# EAGLE board Trafic_led (EAGLE 9.6.2)
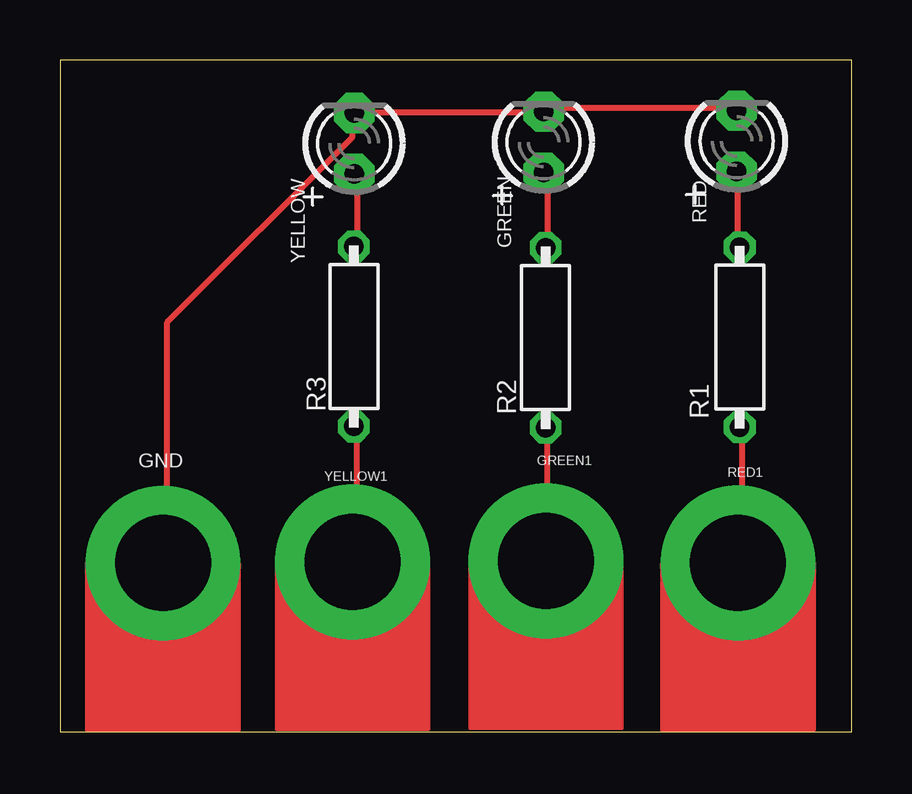
[diagram p0: board, top side]
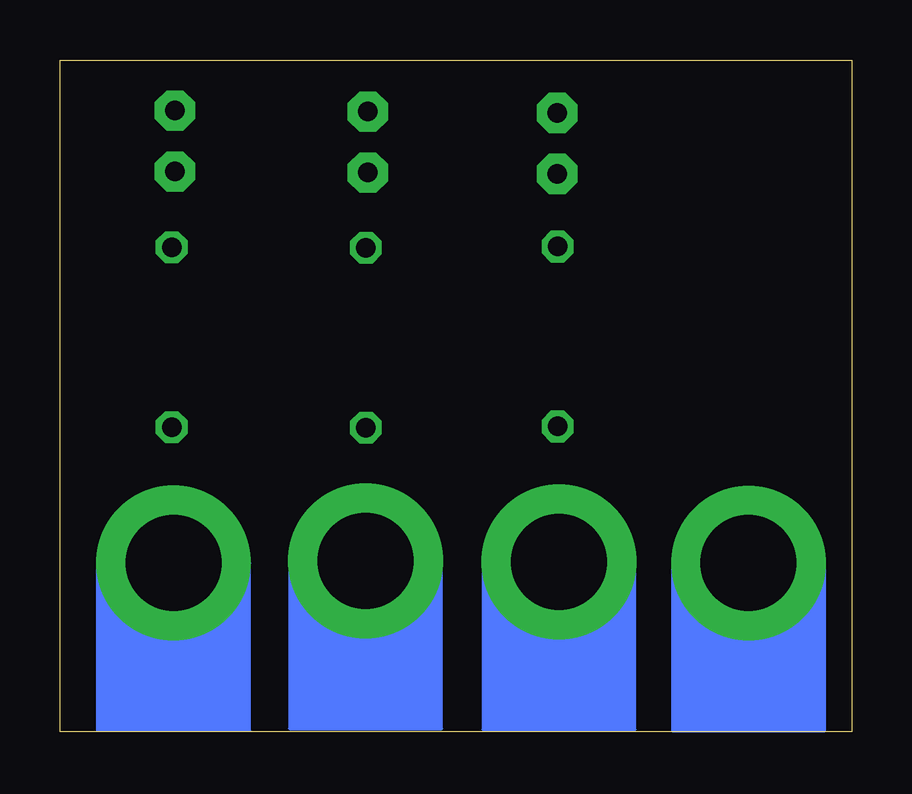
[diagram p1: board, bottom side, seen from below]

Size 33 x 28 mm. Coordinates in mm from the lower left corner, seen from the top.
Outline: 0,0 33,0 33,28 0,28 0,0
Copper layers (1*16): Top 0.035mm / dielectric 1.5mm / Bottom 0.035mm
Design rules "default *": minimum track width 10mil, minimum drill 0.35mm, track to track 6mil, track to pad 6mil, pad to pad 6mil, via to via 6mil, smd to smd 6mil, copper to edge 40mil, drill to drill 6mil, minimum pad ring 10mil, minimum via ring 8mil, stop-mask expansion 4mil, vias tented up to drill 0mil, thermal gap 10mil

## Footprints (pad centres in the part's own frame; a part is rotated, then mirrored left to right if it is on the bottom)
MICROBIT_PAD = drill 4 pad 6.452: PAD 0,0
LED3MM = drill 0.813 pad 1.676 octagon: A -1.27,0; K 1.27,0
R0207/7 = drill 0.813 octagon: 1 -3.75,0; 2 3.75,0

## Placement (x,y rotation side)
GND  MICROBIT_PAD  [MICROBIT_PAD]  4.29,7.02 0 top
GREEN  [LED3MM]  20.16,24.57 90 top
GREEN1  MICROBIT_PAD  [MICROBIT_PAD]  20.26,7.11 0 top
R1  330  [R0207/7]  28.34,16.44 90 top
R2  330  [R0207/7]  20.25,16.42 90 top
R3  330  [R0207/7]  12.26,16.47 90 top
RED  [LED3MM]  28.21,24.62 90 top
RED1  MICROBIT_PAD  [MICROBIT_PAD]  28.27,7.03 0 top
YELLOW  [LED3MM]  12.27,24.52 90 top
YELLOW1  MICROBIT_PAD  [MICROBIT_PAD]  12.2,7.07 0 top

## Library data of the parts
GND GREEN1 RED1 YELLOW1 = microbit
GREEN RED YELLOW = adafruit
R1-R3 = we-rcl

## Nets
GND: GND.PAD GREEN.K RED.K YELLOW.K
N$1: R1.1 RED1.PAD
N$2: R3.1 YELLOW1.PAD
N$3: GREEN.A R2.2
N$4: GREEN1.PAD R2.1
N$5: R3.2 YELLOW.A
N$6: R1.2 RED.A

## Tracks (layer width: path | path; a pad name or v marks a point on that pad's centre or on a via)
GND
  Top 0.254: RED.K 28.04,26.01 20.32,26.01 GREEN.K 20.12,25.81 12.39,25.81 YELLOW.K 12.19,25.6 12.19,24.79 4.47,17.07 4.47,7.11 GND.PAD
N$1
  Top 0.254: R1.1 28.45,12.6 28.45,7.11 RED1.PAD
N$2
  Top 0.254: R3.1 12.39,12.6 12.39,7.11 YELLOW1.PAD
N$3
  Top 0.254: R2.2 20.32,20.32 20.32,23.16 GREEN.A
N$4
  Top 0.254: R2.1 20.32,12.6 20.32,7.11 GREEN1.PAD
N$5
  Top 0.254: R3.2 12.39,20.32 12.39,23.16 YELLOW.A
N$6
  Top 0.254: R1.2 28.25,20.32 28.25,23.16 RED.A